# EAGLE board RS485_Breakout (EAGLE 9.1.3)
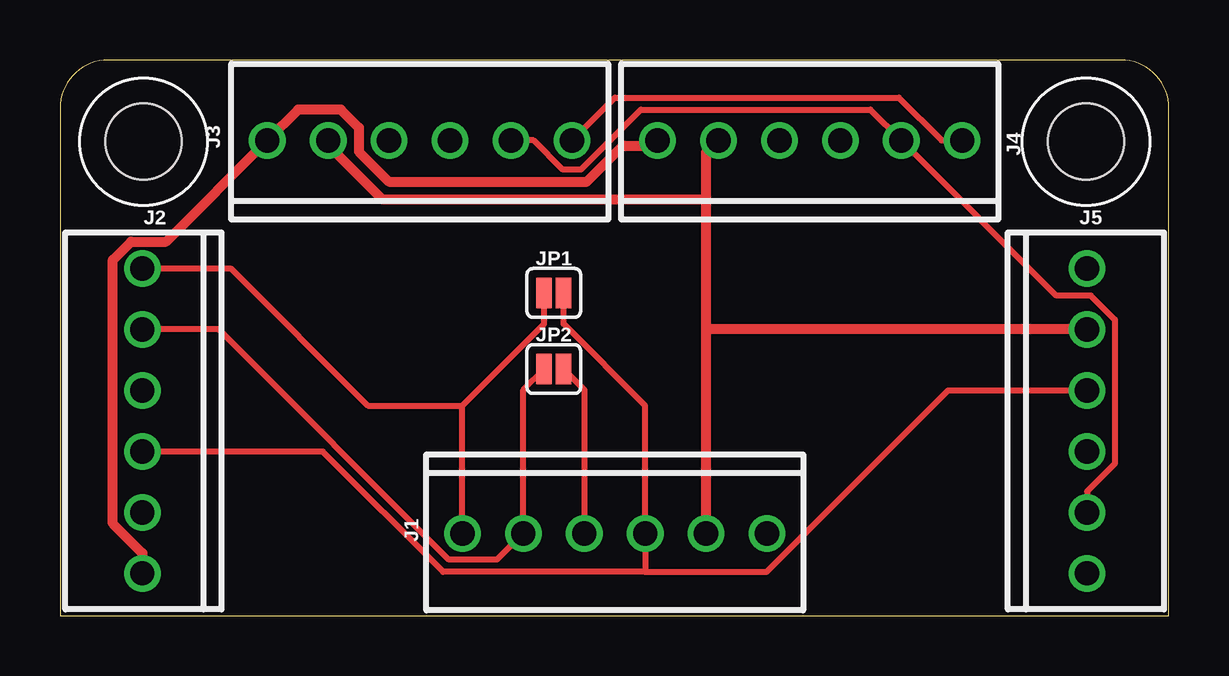
[diagram p0: board, top side]
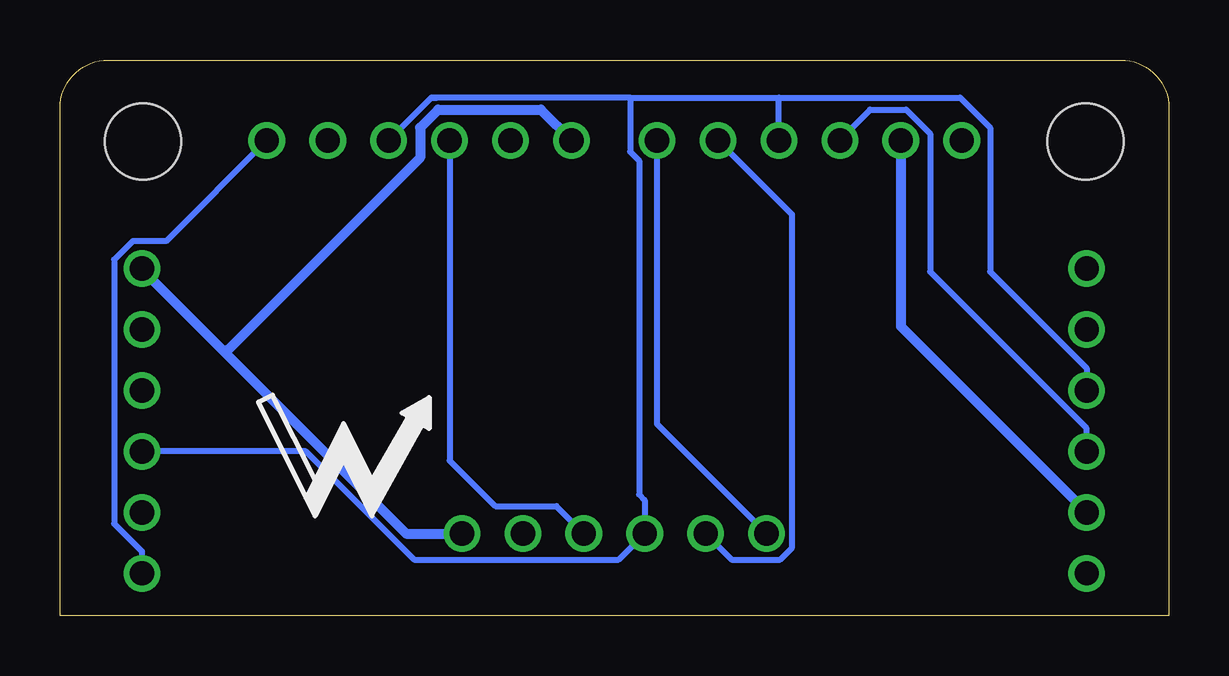
[diagram p1: board, bottom side, seen from below]

Size 46.21 x 23.16 mm. Coordinates in mm from the lower left corner, seen from the top.
Outline: 0,0 46.21,0 46.21,21.16 arc90 44.21,23.16 2,23.16 arc90 0,21.16 0,0
Copper layers (1*16): Top 0.035mm / dielectric 1.5mm / Bottom 0.035mm
Design rules "default": minimum track width 6mil, minimum drill 0.35mm, track to track 6mil, track to pad 6mil, pad to pad 6mil, via to via 6mil, smd to smd 6mil, copper to edge 40mil, drill to drill 6mil, minimum pad ring 10mil, minimum via ring 8mil, stop-mask expansion 4mil, vias tented up to drill 0mil, thermal gap 10mil
Net classes: 1 Power: width 0.406 mm; 2 Signal: width 0.254 mm

## Footprints (pad centres in the part's own frame; a part is rotated, then mirrored left to right if it is on the bottom)
4_40 = hole 3.175: 0,0
1X06_SCREW = drill 1.016: 1 -6.35,0; 2 -3.81,0; 3 -1.27,0; 4 1.27,0; 5 3.81,0; 6 6.35,0
SMT-JUMPER_2_NO_SILK = smd 0.635 x 1.27: 1 -0.406,0; 2 0.406,0

## Placement (x,y rotation side)
H1  [4_40]  42.75,19.76 0 top
H2  [4_40]  3.48,19.76 0 top
J1  CONN_6SCREW_2.54  [1X06_SCREW]  23.11,3.43 0 top
J2  CONN_6SCREW_2.54  [1X06_SCREW]  3.43,8.13 270 top
J3  CONN_6SCREW_2.54  [1X06_SCREW]  14.99,19.81 180 top
J4  CONN_6SCREW_2.54  [1X06_SCREW]  31.24,19.81 180 top
J5  CONN_6SCREW_2.54  [1X06_SCREW]  42.8,8.13 90 top
JP1  JUMPER-SMT_2_NO_SILK  [SMT-JUMPER_2_NO_SILK]  20.57,13.46 0 top
JP2  JUMPER-SMT_2_NO_SILK  [SMT-JUMPER_2_NO_SILK]  20.57,10.29 0 top
U$1  [NWLOGO_MED]  34.42,7.11 0 bottom

## Library data of the parts
H1 H2 = bschulz
J1-J5 = bschulz; DIGIKEY: ED10565-ND; MF: OnShore; MPN: OSTVN06A150
JP1 JP2 = SparkFun-Jumpers
U$1 = awickert

## Nets
GND [Power]: J1.6 J2.6 J3.6 J4.6 J5.6
RX+ [Signal]: J1.1 J2.1 J3.1 J4.1 J5.1 JP1.1
RX- [Signal]: J1.2 J2.2 J3.2 J4.2 J5.2 JP2.1
TX+ [Signal]: J1.4 J2.4 J3.4 J4.4 J5.4 JP1.2
TX- [Signal]: J1.3 J2.3 J3.3 J4.3 J5.3 JP2.2
VCC [Power]: J1.5 J2.5 J3.5 J4.5 J5.5

## Tracks (layer width: path | path; a pad name or v marks a point on that pad's centre or on a via)
GND
  Top 0.406: J4.6 24.77,19.68 24.69,19.59 23.45,19.59 21.95,18.09 13.7,18.09 12.45,19.34 12.45,20.34 11.7,21.09 9.92,21.09 J3.6 4.42,15.6 2.97,15.6 2.21,14.85 2.2,14.85 2.2,3.85 3.43,2.62 J2.6
  Bottom 0.406: 39.33,10.97 42.7,14.35 J5.6 | 39.33,10.97 39.2,11.1 31.2,19.09 31.2,20.34 30.45,21.09 26.18,21.09 J4.6 | 39.33,10.97 31.79,3.43 J1.6
RX+
  Top 0.254: 20.08,13.37 JP1.1 20.17,12.17 16.76,8.76 | J1.1 16.76,8.76 | J2.1 7.11,14.48 12.83,8.76 16.76,8.76 | J3.1 23.12,21.59 34.95,21.59 36.73,19.81 J4.1
  Bottom 0.254: J5.1 42.8,2.69 43.95,3.85 43.95,14.85 43.18,15.62 41.78,15.62 J4.1 | J3.1 21.34,8 J1.1
RX-
  Top 0.254: JP2.1 19.3,9.42 J1.2 19.2,3.35 18.2,2.35 16.2,2.35 6.61,11.94 J2.2 | J3.2 19.73,19.81 20.95,18.59 21.7,18.59 24.2,21.09 33.77,21.09 J4.2 41.52,13.35 42.95,13.35 43.95,12.35 43.95,6.34 42.8,5.19 J5.2
  Bottom 0.254: J3.2 15.7,16.72 15.7,2.85 16.2,2.35 18.22,2.35 J1.2
TX+
  Top 0.254: 21.08,13.37 JP1.2 20.98,12.17 24.38,8.76 J1.4 | J2.4 3.45,6.84 10.95,6.84 15.96,1.84 24.38,1.84 | 24.38,3.41 J1.4 | 24.38,1.84 29.44,1.84 37.01,9.4 J5.4 | J1.4 24.38,1.84
  Bottom 0.254: J2.4 3.45,7.09 3.45,7.84 9.95,14.35 9.95,20.09 10.95,21.09 12.45,21.09 13.7,19.84 J3.4 | J1.4 25.53,4.57 28.07,4.57 29.97,6.48 J4.4
TX-
  Top 0.254: JP2.2 21.84,9.42 J1.3
  Bottom 0.254: 22.45,21.59 30.48,21.59 | 30.48,21.59 30.7,21.59 | 22.45,21.59 22.45,19.34 22.08,18.97 22.08,5.06 21.84,4.83 J1.3 22.93,2.35 31.45,2.35 35.97,6.86 J5.3 | 22.45,21.59 16.26,21.59 | 16.26,21.59 8.7,21.59 7.45,20.34 7.45,14.35 3.43,10.32 J2.3 | J3.3 16.26,21.59 | J4.3 30.73,21.59 30.48,21.59
VCC
  Top 0.406: J1.5 26.92,11.94 | 26.92,11.94 26.92,17.4 | 26.92,17.4 26.92,19.3 J4.5 | J5.5 26.92,11.94 | 26.92,17.4 26.87,17.34 13.45,17.34 11.18,19.62 J3.5
  Bottom 0.406: J2.5 11.18,12.06 J3.5

## Text on the board
tDocu: GND | VCC | TX+ | TX- | RX- | RX+ | GND | VCC | TX+ | TX- | RX- | RX+ | RX+ | GND | J1 | RX- | VCC | J2 | TX- | TX+ | TX+ | RX+ | RX- | TX- | TX+ | VCC | GND | TX- | VCC | RX- | GND | RX+
bDocu: GND | VCC | A | B | B | A | GND | VCC | A | B | B | A | A | GND | Project Heptapod (RS485) / ---------------------- / Designed by / Northern Widget and / University of Minnesota | B | VCC | B | A | A | Jump J1 & J2 / for Half Duplex | B | A | B | B | A | VCC | GND | VCC | B | GND | A